# Altium PCB Synapse(all).PcbDoc
Units mil, origin at the board's own origin, x right, y up, seen from the top; angles counter-clockwise.
Board outline 2310 x 984.25 mil, 2 copper layers (Top Layer, Bottom Layer); 29 components, 21 nets, 100 pads, 2 vias.
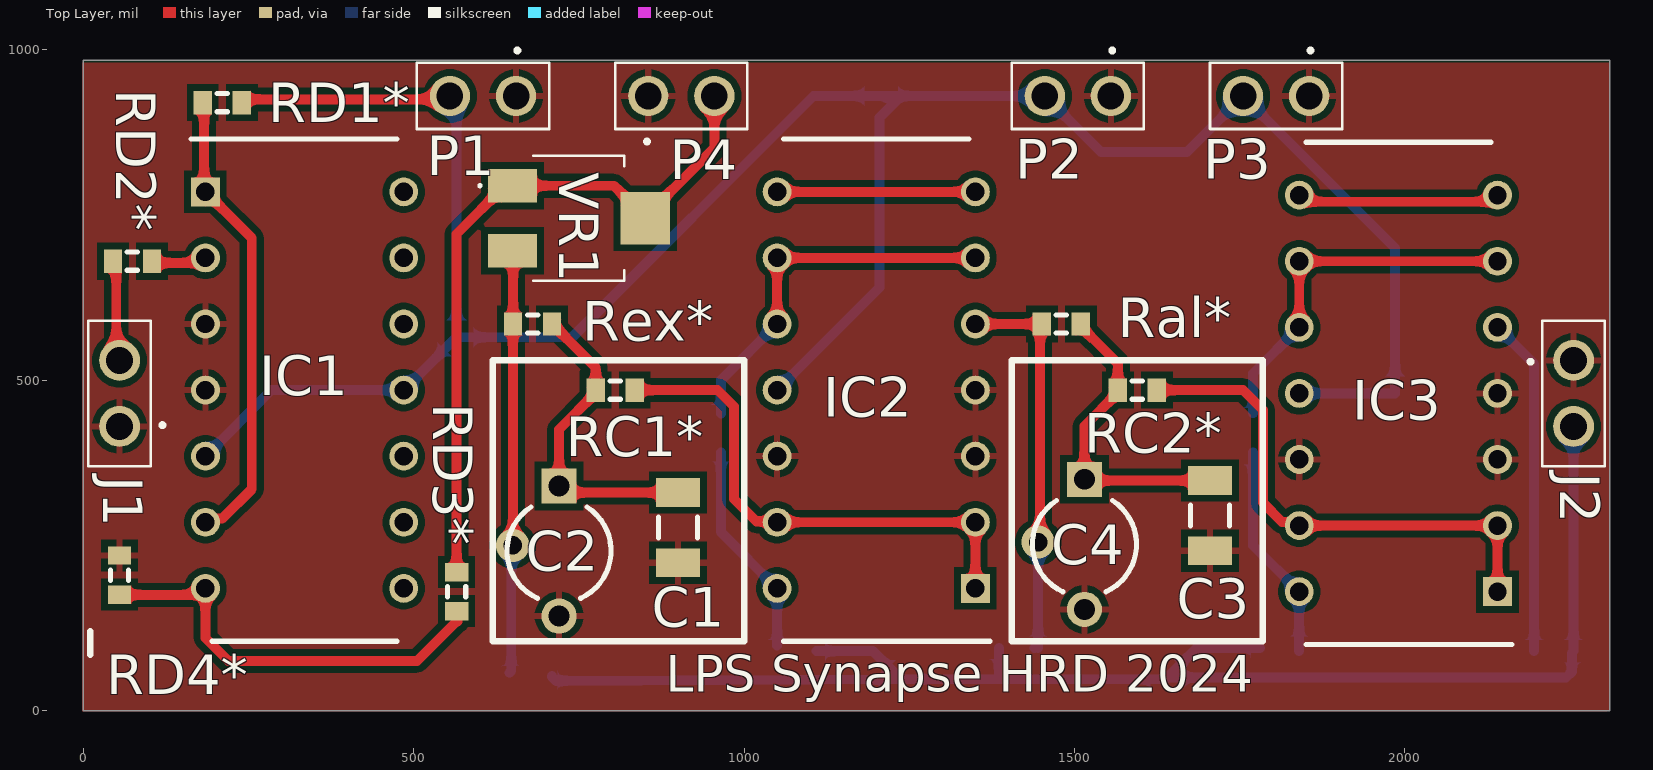
[diagram p0: Top Layer view]
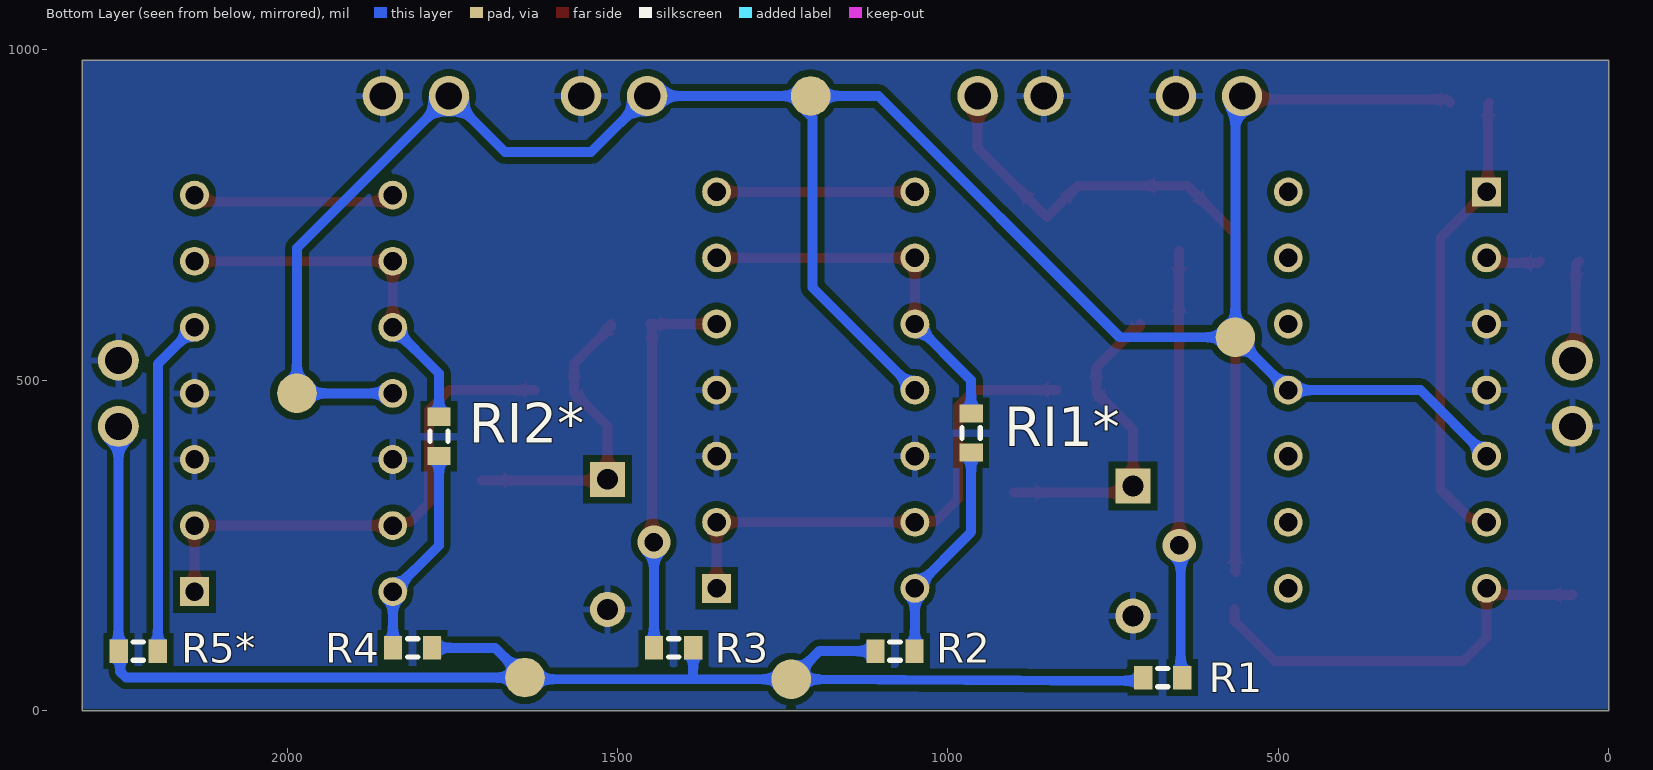
[diagram p1: Bottom Layer view, seen from below]

## Layer stack, top to bottom
Top Solder: solder mask 0.4, Solder Resist, Dk 3.5
Top Layer: signal copper 1.4
Dielectric 1: dielectric 12.6, FR-4, Dk 4.8
Bottom Layer: signal copper 1.4
Bottom Solder: solder mask 0.4, Solder Resist, Dk 3.5

## Board outline
0,0 0,984.25 2310,984.25 2310,0

## Design rules (kind name [scope] priority, off if disabled: settings)
Clearance [All] p1: gap=6 ignorepadtopadclearanceinfootprint=FALSE except(10: Arc-Poly Track-Poly SMDPad-Poly THPad-Poly Via-Poly Fill-Poly Poly-Poly)
NetAntennae [All] p1: netantennaetolerance=1
PolygonConnect [All] p1: thpad.connectstyle=Relief thpad.reliefconductorwidth=10 thpad.reliefentries=4 thpad.polygonreliefangle="90 Angle" thpad.airgapwidth=10 smdpad.connectstyle=Relief smdpad.reliefconductorwidth=10 smdpad.reliefentries=4 smdpad.polygonreliefangle="90 Angle" smdpad.airgapwidth=10 via.connectstyle=Direct via.reliefconductorwidth=10 via.reliefentries=4 via.polygonreliefangle="90 Angle" via.airgapwidth=10
RoutingVias [All] p1: holewidth=28 width=50 viastyle="Through Hole" minholewidth=28 minwidth=50 maxholewidth=28 maxwidth=50
SilkToSilkClearance [All] p1: silktosilkclearance=1
SilkToSolderMaskClearance [IsPad] p1: minsilkscreentomaskgap=1 clearancetoexposedcopper=TRUE
SolderMaskExpansion [All] p1: expansion=4 istentingtop=FALSE
UnRoutedNet [All] p1: checkbadconnections=TRUE
Width [All] p1: maxlimit=20 minlimit=10 preferedwidth=15
26 further rules are at their usual default settings.

## Classes and differential pairs
component class 2: C3 C4 IC3 RC2* RI2*
component class Synapse(all): J1 J2 P1 P2 P3 R1 R2 R3 R4 R5* Ral* REx*
component class 0: IC1 P4 RD1* RD2* RD3* RD4* VR1
component class 1: C1 C2 IC2 RC1* RI1*

## Components (designator, comment, footprint, x,y, rotation, side; value= is the part's Value field where it differs from the comment)
C1 "Cap Semi" C1206 900,276.85 r90 top value=100uF
C2 "Cap2" CAPR5-4X5 720,241.57 r270 top value=100pF
C3 "Cap Semi" C1206 1705,295 r90 top value=100pF
C4 "Cap2" CAPR5-4X5 1515,251.57 r270 top value=100pF
IC1 "ALD1105PBL" DIP762W51P254L1828H508Q14N 335,485 r0 top
IC2 "ALD1105PBL" DIP762W51P254L1828H508Q14N 1200,485 r180 top
IC3 "ALD1105PBL" DIP762W51P254L1828H508Q14N 1990,480 r180 top
J1 "SSW-102-01-G-S" SSW-102-XX-YYY-S 55,430 r90 top
J2 "SSW-102-01-G-S" SSW-102-XX-YYY-S 2255,530 r270 top
P1 "TSW-102-07-G-S" TSW-102-XX-YY-S 655,930 r180 top
P2 "TSW-102-07-G-S" TSW-102-XX-YY-S 1555,930 r180 top
P3 "TSW-102-07-G-S" TSW-102-XX-YY-S 1855,930 r180 top
P4 "TSW-102-07-G-S" TSW-102-XX-YY-S 855,930 r0 top
R1 "Res3" J1-0603 675,50 r0 bottom value=0
R2 "Res3" J1-0603 1080,90 r0 bottom value=0
R3 "Res3" J1-0603 1415,95 r180 bottom value=0
R4 "Res3" J1-0603 1810,95 r180 bottom value=0
R5* "Res3" J1-0603 2225,90 r0 bottom value=0
Ral* "Res3" J1-0603 1480,585 r180 top value=0
RC1* "Res3" J1-0603 805,485 r0 top value=1K
RC2* "Res3" J1-0603 1595,485 r0 top value=1K
RD1* "Res3" J1-0603 210.47,920 r180 top value=100K
RD2* "Res3" J1-0603 74.53,680 r0 top value=100K
RD3* "Res3" J1-0603 565,180 r90 top value=0
RD4* "Res3" J1-0603 55,205 r270 top value=1K
Rex* "Res3" J1-0603 680,585 r180 top value=0 (schematic designator REx*)
RI1* "Res3" J1-0603 965,420 r90 bottom value=1K
RI2* "Res3" J1-0603 1770,415 r90 bottom value=1K
VR1 "3214X-1-203E" 3214X1203E 750,745 r0 top

## Footprints (in the part's own frame and the unit in brackets; to place one, negate y for a bottom-side part, rotate by r counter-clockwise, add the part's x,y. Pads: shape width x height; smd on the part's side, far side on the other; paste and mask are expansions set on the pad)
3214X1203E [mm]
  rect 1.9x1.3 smd: 1(-2.55,1.25) 3(-2.55,-1.25)
  rect 1.9x2 smd: 2(2.55,0)
  silkscreen extent -3.85,-2.4 1.75,2.4, body extent -3.01,-2.43 2.67,2.4, height 5.32
C1206 [mm] "Chip Capacitor, Body 3.2x1.6mm, IPC High Density"
  rect 1.1x1.7 smd: 1(-1.35,0) 2(1.35,0)
  silkscreen extent -0.4,-0.75 0.4,0.75, body extent -1.7,-0.9 1.7,0.9, height 1.3
CAPR5-4X5 [mm] "Capacitor; 2 Leads"
  rect 1.35x1.35 hole 0.8: 1(-2.5,0)
  round 1.35 hole 0.8: 2(2.5,0)
  silkscreen extent -1.69,-2 1.82,2
DIP762W51P254L1828H508Q14N [mm]
  rect 1.11x1.11 hole 0.71: 1(-3.81,7.62)
  round 1.11 hole 0.71: 2(-3.81,5.08) 3(-3.81,2.54) 4(-3.81,0) 5(-3.81,-2.54) 6(-3.81,-5.08) 7(-3.81,-7.62) 8(3.81,-7.62) 9(3.81,-5.08) 10(3.81,-2.54) 11(3.81,0) 12(3.81,2.54) 13(3.81,5.08) 14(3.81,7.62)
  silkscreen extent -4.37,-9.65 3.55,9.65, body extent -3.94,-9.14 3.94,9.14, height 5.08
J1-0603 [mm] "Chip Resistor, Body 1.6x0.8mm, IPC High Density"
  rect 0.7x0.9 smd: 1(-0.75,0) 2(0.75,0)
  silkscreen extent -0.2,-0.35 0.2,0.35, body extent -0.85,-0.48 0.85,0.48, height 0.9
SSW-102-XX-YYY-S [mm]
  round 1.57 hole 1.04: 1(0,0) 2(2.54,0)
  silkscreen extent -1.53,-1.7 4.07,1.2, body extent -1.53,-1.2 4.07,1.2, height 8.51
TSW-102-XX-YY-S [mm]
  round 1.55 hole 1.02: 1(0,0) 2(2.54,0)
  silkscreen extent -1.27,-1.8 3.81,1.27, body extent -1.39,-1.28 3.82,1.26, height 9.16

## Part data
C1 C3: "Capacitor (Semiconductor SIM Model)", LatestRevisionDate=29-May-2009, LatestRevisionNote="IPC-7351 Footprint Added.", PackageDescription="Chip Capacitor", PackageReference=C1206, Published=8-Jun-2000, Publisher="Altium Limited"
C2 C4: "Capacitor", PackageDescription="Capacitor; 2 Leads", PackageReference=CAPR5-4X5, Published=23-Sep-2002, Publisher="Altium Limited"
IC1 IC2 IC3: "Integrated Circuit", Manufacturer_Name="Advanced Linear Devices Inc.", Mouser Part Number=585-ALD1105PBL, Datasheet Link=https://www.mouser.es/datasheet/2/8/ALD1105-963896.pdf, Height=5.08mm, Manufacturer_Part_Number=ALD1105PBL, Mouser Price/Stock=https://www.mouser.co.uk/ProductDetail/Advanced-Linear-Devices/ALD1105PBL?qs=Du6x3Vjr3lUq%2FSLBVb98Ng%3D%3D
J1 J2: "Connector", Manufacturer_Name=SAMTEC, Mouser Part Number=200-SSW10201GS, Arrow Part Number=SSW-102-01-G-S, Arrow Price/Stock=https://www.arrow.com/en/products/ssw-102-01-g-s/samtec?region=europe, Datasheet Link=http://suddendocs.samtec.com/prints/ssw-1xx-xx-xxx-x-xx-xxx-xx-mkt.pdf, Height=8.51mm, Manufacturer_Part_Number=SSW-102-01-G-S, Mouser Price/Stock=https://www.mouser.co.uk/ProductDetail/Samtec/SSW-102-01-G-S?qs=92ilVni64gwMaw8Iglb9kA%3D%3D
P1 P2 P3 P4: "Connector", Manufacturer_Name=SAMTEC, Mouser Part Number=200-TSW10207GS, Arrow Part Number=TSW-102-07-G-S, Arrow Price/Stock=https://www.arrow.com/en/products/tsw-102-07-g-s/samtec?region=europe, Datasheet Link=http://suddendocs.samtec.com/prints/tsw-xxx-xx-xxx-x-xx-xxx-mkt.pdf, Manufacturer_Part_Number=TSW-102-07-G-S, Mouser Price/Stock=https://www.mouser.co.uk/ProductDetail/Samtec/TSW-102-07-G-S?qs=iT52DjcXudsNPhlNCDp8vw%3D%3D
R1 R2 R3 R4 R5* Ral* RC1* RC2* RD1* RD2* RD3* RD4* Rex* RI1* RI2*: "Resistor", LatestRevisionDate=29-May-2009, LatestRevisionNote="IPC-7351 Footprint Added.", PackageDescription="Chip Resistor", PackageReference=J1-0603, Published=8-Jun-2000, Publisher="Altium Limited"
VR1: "Variable Resistor", Manufacturer_Name=Bourns, Mouser Part Number=652-3214X-1-203E, Arrow Part Number=3214X-1-203E, Arrow Price/Stock=https://www.arrow.com/en/products/3214x-1-203e/bourns?region=nac, Datasheet Link=https://www.bourns.com/pdfs/3214.pdf, Height=5.3mm, Manufacturer_Part_Number=3214X-1-203E, Mouser Price/Stock=https://www.mouser.co.uk/ProductDetail/Bourns/3214X-1-203E?qs=GbiU%252BivmtKCiZgVfjOTq7A%3D%3D

## Free pads (board coordinates)
  round 60 smd far side: 5(1237.22,47.5) 5(1640,50) 7(1985,480) 9(565,565) 10(1207.63,930)

## Via types
v1: diameter 50, hole 28, Top Layer to Bottom Layer, 2 vias

## Nets (pads, with @x,y where several pads share a name; then routed paths per layer and width w, separated by ;. In a path a pad name is that pad's centre, name@x,y a point inside that pad or via, vN(x,y) a via of type N, cw(c..) or ccw(c..) an arc to the next point about the centre after c; other vN are vias at no path point)
+5V: IC1.5 IC1.11 IC2.11 IC3.11 P1.2 P2.2 P3.2 pad.7 pad.9 pad.10 RD1*.1 | length 3783.7
  Top Layer w15: RD1*.1 245,925 550,925 P1.2
  Bottom Layer w15: IC1.5 285,485 IC1.11 pad.9 ; P1.2 555,917.55 565,907.55 pad.9 ; IC2.11 1205,640 1205,897.14 1228.68,920.82 pad.10 ; IC3.11@1844.35,484.35 IC3.11 pad.7 1985,700 P3.2 1670,845 1540,845 P2.2 pad.10 ; pad.9 740,565 1105,930 pad.10
GND: C1.1 C2.2 C3.1 C4.2 IC1.3 IC1.4 IC2.3 IC2.4 IC2.12 IC3.3 IC3.4 IC3.12 J1.1 J2.1 P1.1 P2.1 P3.1 P4.1 RD4*.1
IN: J1.2 RD2*.1 | length 154.1
  Top Layer w15: RD2*.1 50,675 50,535 J1.2
NetC1_2: C1.2 C2.1 RC1*.1 Rex*.1 | length 481.7
  Top Layer w15: Rex*.1 709.53,581.06 715.81,574.78 719.74,574.78 775.47,519.05 775.47,481.06 720,425.59 C2.1 730,330 C1.2
NetC3_2: C3.2 C4.1 Ral*.1 RC2*.1 | length 469.9
  Top Layer w15: Ral*.1 1509.53,581.06 1540.59,550 1540.69,550 1565.47,525.22 RC2*.1 1565.47,481.06 1515,430.59 C4.1 1516.85,348.15 C3.2
NetIC1_1: IC1.1 IC1.6 RD1*.2 | length 706.4
  Top Layer w15: RD1*.2 182.97,917.97 182.97,787.03 IC1.1 199.35,770.65 255,715 255,335 210.49,290.49 190.49,290.49 IC1.6
NetIC1_2: IC1.2 RD2*.2 | length 79.5
  Top Layer w15: RD2*.2 106.56,677.5 IC1.2@182.5,677.5
NetIC1_7: IC1.7 RD3*.1 RD4*.2 | length 634.5
  Top Layer w15: RD4*.2 55.24,175.24 184.76,175.24 185,175 185,110 220,75 505,75 565,135 566.21,135 RD3*.1@566.21,153.72
NetIC2_1: IC2.1 IC2.2 IC2.13 RC1*.2 | length 780.3
  Top Layer w15: RC1*.2 960,485 985,460 985,320 1018.64,286.36 1048.64,286.36 IC2.13 IC2.2 IC2.1
NetIC2_5: IC2.5 R3.1 Ral*.2 | length 593.6
  Top Layer w15: IC2.5 Ral*.2 1447.74,582.26 1447.74,257.74 v1(1445,255)
  Bottom Layer w15: R3.1@1439.53,95 R3.1@1440,95.47 ; R3.1 1444.76,95.24 1444.76,254.76 v1(1445,255)
NetIC2_6: IC2.6 IC2.9 IC2.10 RI1*.2 | length 570.7
  Top Layer w15: IC2.10 IC2.9 IC2.6
  Bottom Layer w15: RI1*.2 965,500 IC2.10
NetIC2_7: IC2.7 IC2.8 | length 300
  Top Layer w15: IC2.8 IC2.7
NetIC2_14: IC2.14 R2.1 RI1*.1 | length 326.9
  Bottom Layer w15: RI1*.1 965,270 IC2.14 R2.1@1050,98.78
NetIC3_1: IC3.1 IC3.2 IC3.13 RC2*.2 | length 782.6
  Top Layer w15: RC2*.2 1755,485 1785,455 1785,314.59 1814.1,285.49 1834.51,285.49 IC3.13 IC3.2 IC3.1
NetIC3_5: IC3.5 R5*.1 | length 513
  Bottom Layer w15: IC3.5 2195.47,524.53 R5*.1
NetIC3_6: IC3.6 IC3.9 IC3.10 RI2*.2 | length 559
  Top Layer w15: IC3.10 IC3.9 IC3.6
  Bottom Layer w15: RI2*.2@1770,450 1770,510 IC3.10
NetIC3_7: IC3.7 IC3.8 | length 300
  Top Layer w15: IC3.8@1845,770 IC3.7@2145,770
NetIC3_14: IC3.14 R4.1 RI2*.1 | length 335.1
  Bottom Layer w15: RI2*.1@1770,390.94 1770,250 IC3.14 1839.76,179.76 1839.76,95.24 R4.1 ; R4.1@1839.76,90 R4.1@1839.76,100
NetR1_1: R1.1 Rex*.2 VR1.3 | length 641
  Top Layer w15: VR1.3 650.47,694.92 Rex*.2 650.24,584.76 650.24,250.24 v1(650,250)
  Bottom Layer w15: R1.1@645.24,57.36 647.74,59.86 647.74,247.74 v1(650,250)
OUT: J2.2 pad.5 R1.2 R2.2 R3.2 R4.2 R5*.2 | length 2275.4
  Bottom Layer w15: R1.2@709.53,52.13 709.53,51.28 715.81,45 pad.5@1237.22,47.5 ; R2.2 1194.72,90 pad.5@1237.22,47.5 ; R3.2 1385.47,47.97 1385,47.5 ; R4.2 1685,95 pad.5@1640,50 ; J2.2 2255,90 2252.42,87.42 2252.42,58.79 2243.64,50 pad.5@1640,50 ; pad.5@1237.22,47.5 1385,47.5 ; 1385,47.5 1637.5,47.5 pad.5@1640,50
Voltage_IN: P4.2 RD3*.2 VR1.1 VR1.2 | length 1080.4
  Top Layer w15: RD3*.2 565,721.42 637.8,794.21 VR1.1 803.15,794.21 850.39,746.97 955,851.57 P4.2 P4.2@950.02,925.02
pads on no net: IC1.8 IC1.9 IC1.10 IC1.12 IC1.13 IC1.14

## Polygon pours and split planes (outlines as drawn)
GND on Top Layer "top" (solid, pour order 5): -1.58,980.59 2308.42,980.59 2308.42,-3.66 2305.39,-0.63 -1.58,-0.63
GND on Bottom Layer "bottom" (solid, pour order 4): 0,984.25 2310,984.25 2310,0 2306.97,3.03 0,3.03

## Silkscreen, mask and mechanical layers (free items; w line width, h text height)
Top Overlay:
  lines w10: 10.84,85 10.84,120 ; 620,105 1000,105 1000,530 620,530 620,105 ; 1405,105 1785,105 1785,530 1405,530 1405,105
  text "LPS Synapse HRD 2024" at 881.58,28.33 h55
Mechanical 1:
  lines w10: 0,982.07 0,99.71 0,0 2310,0 2310,984.25 0,984.25